# Altium PCB MainPCB.PcbDoc (part 1 of 4)
Units mm, origin at the board's own origin, x right, y up, seen from the top; angles counter-clockwise.
Board outline 219.96 x 164.97 mm, 2 copper layers (Top Layer, Bottom Layer); 298 components, 220 nets, 976 pads, 1045 vias.
Unrouted connection lines stored in the file: 1.
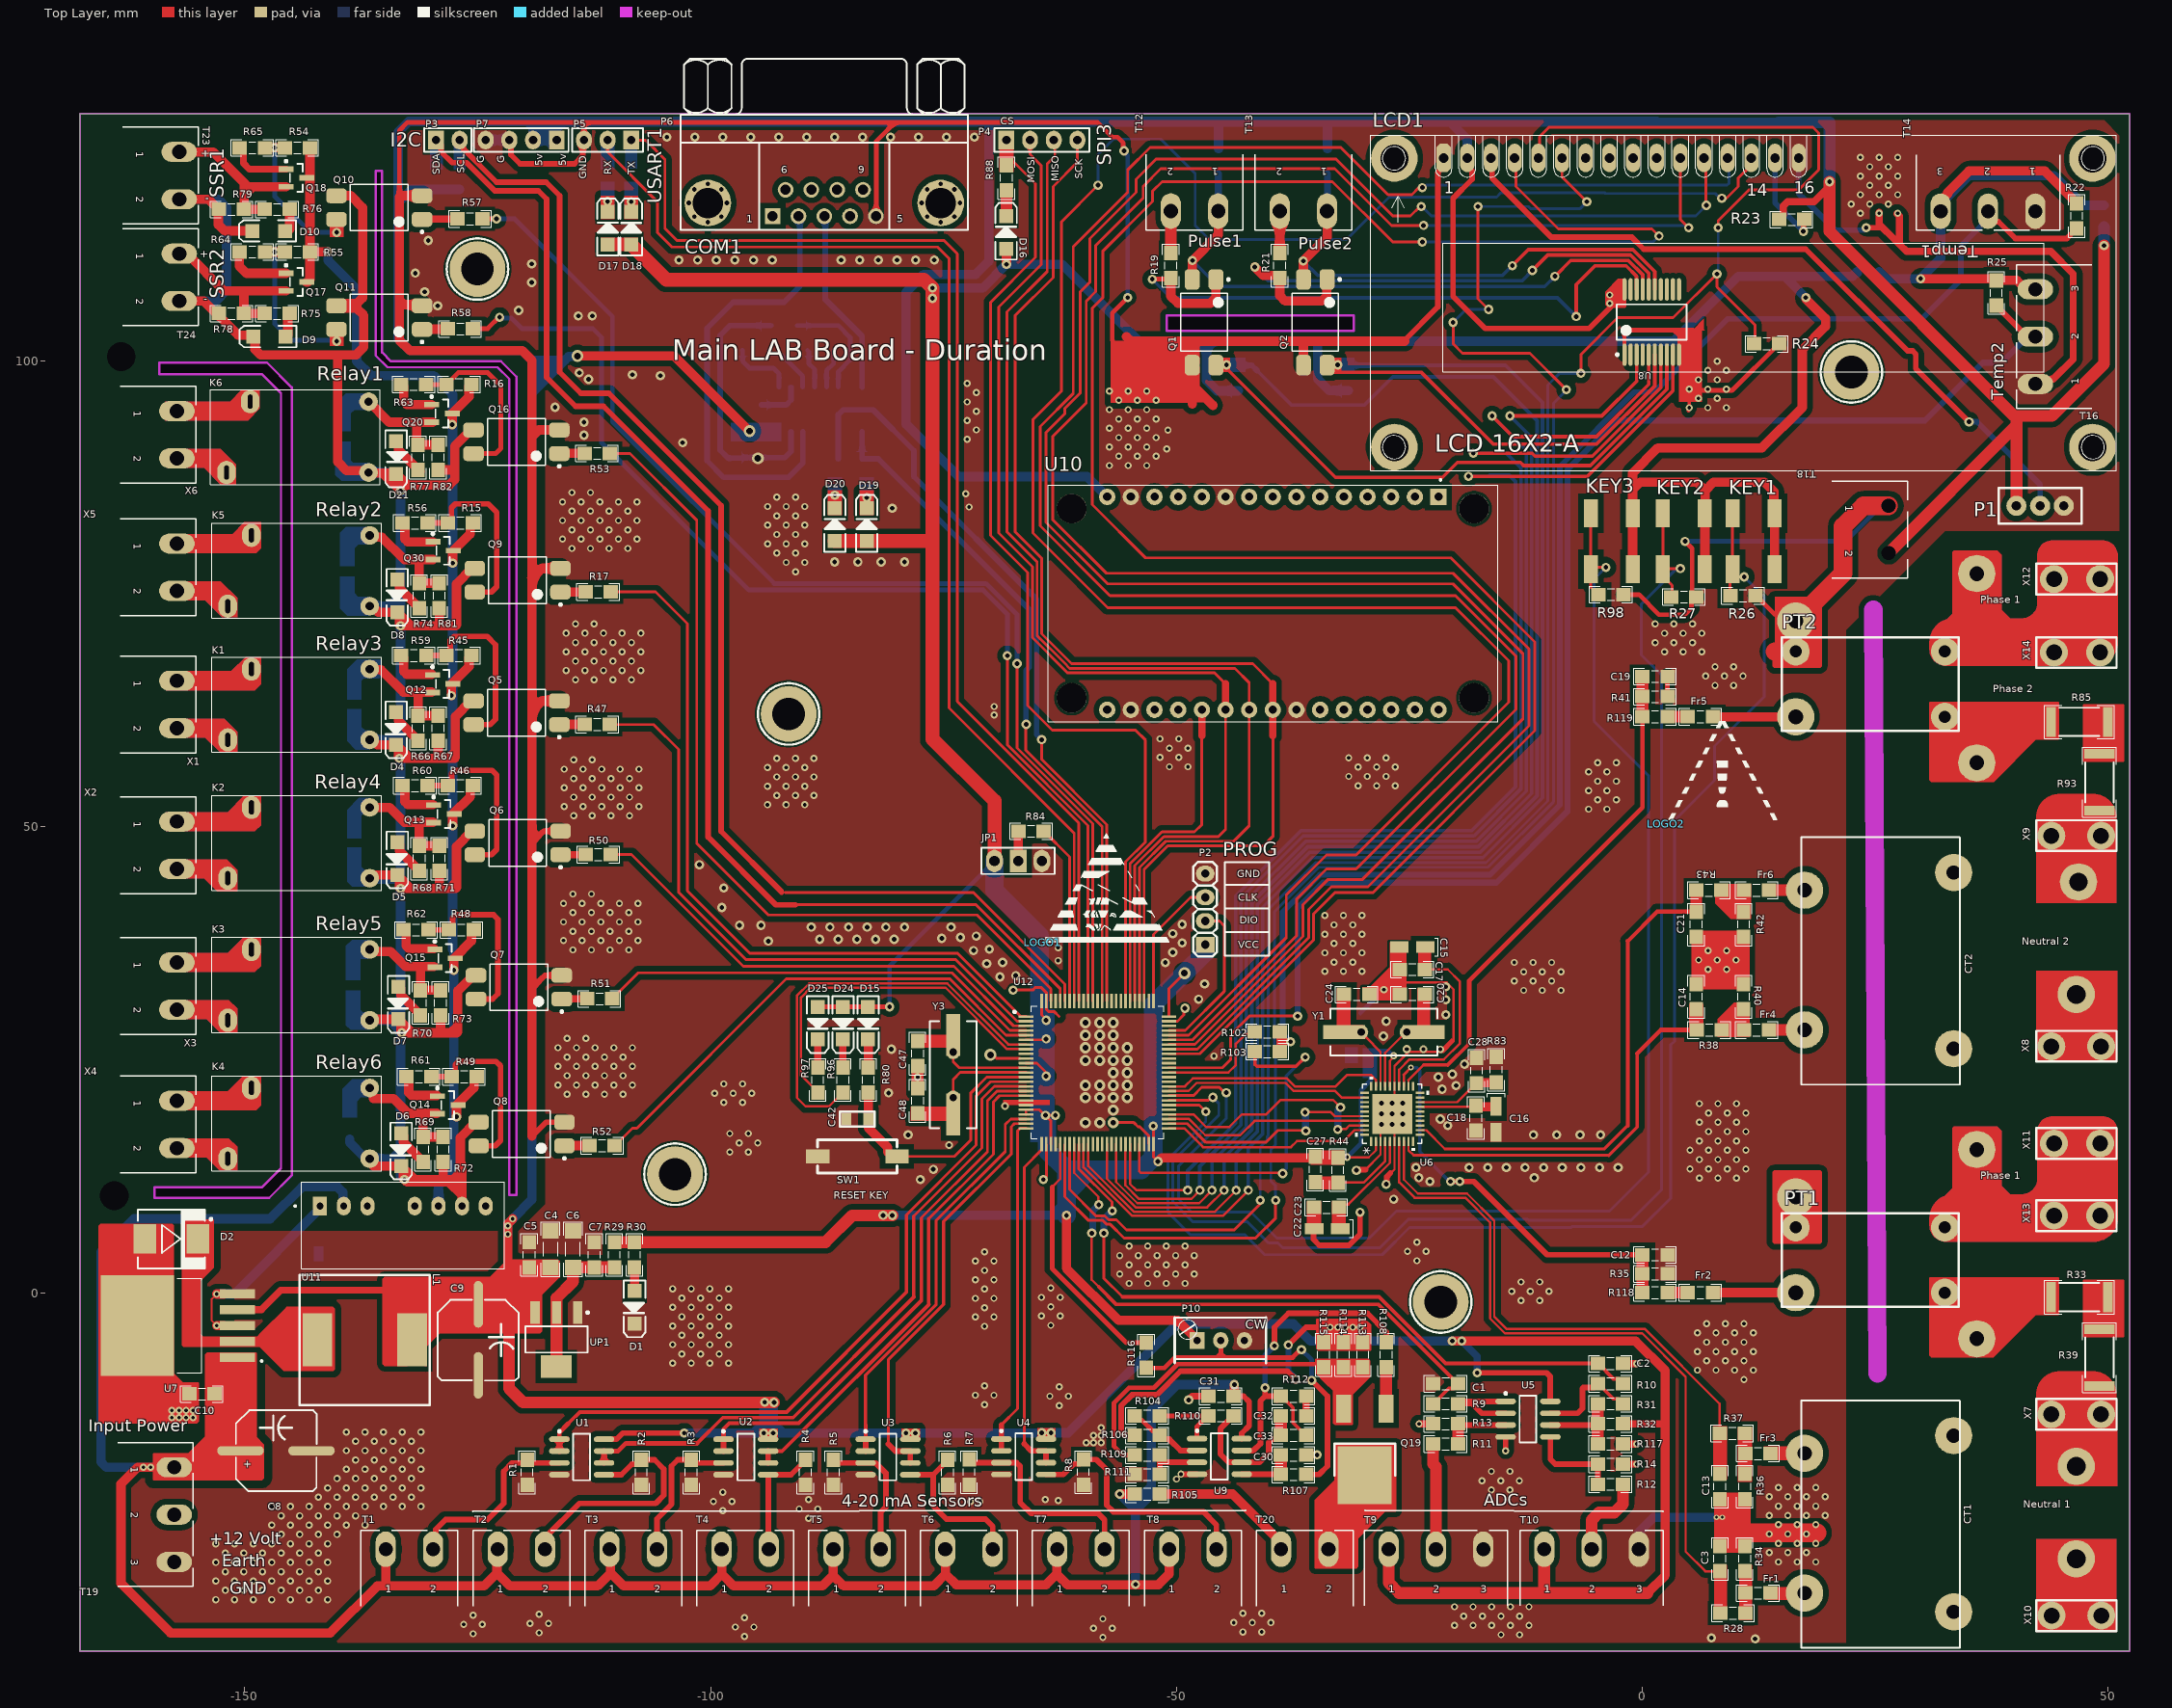
[diagram p0: Top Layer view]
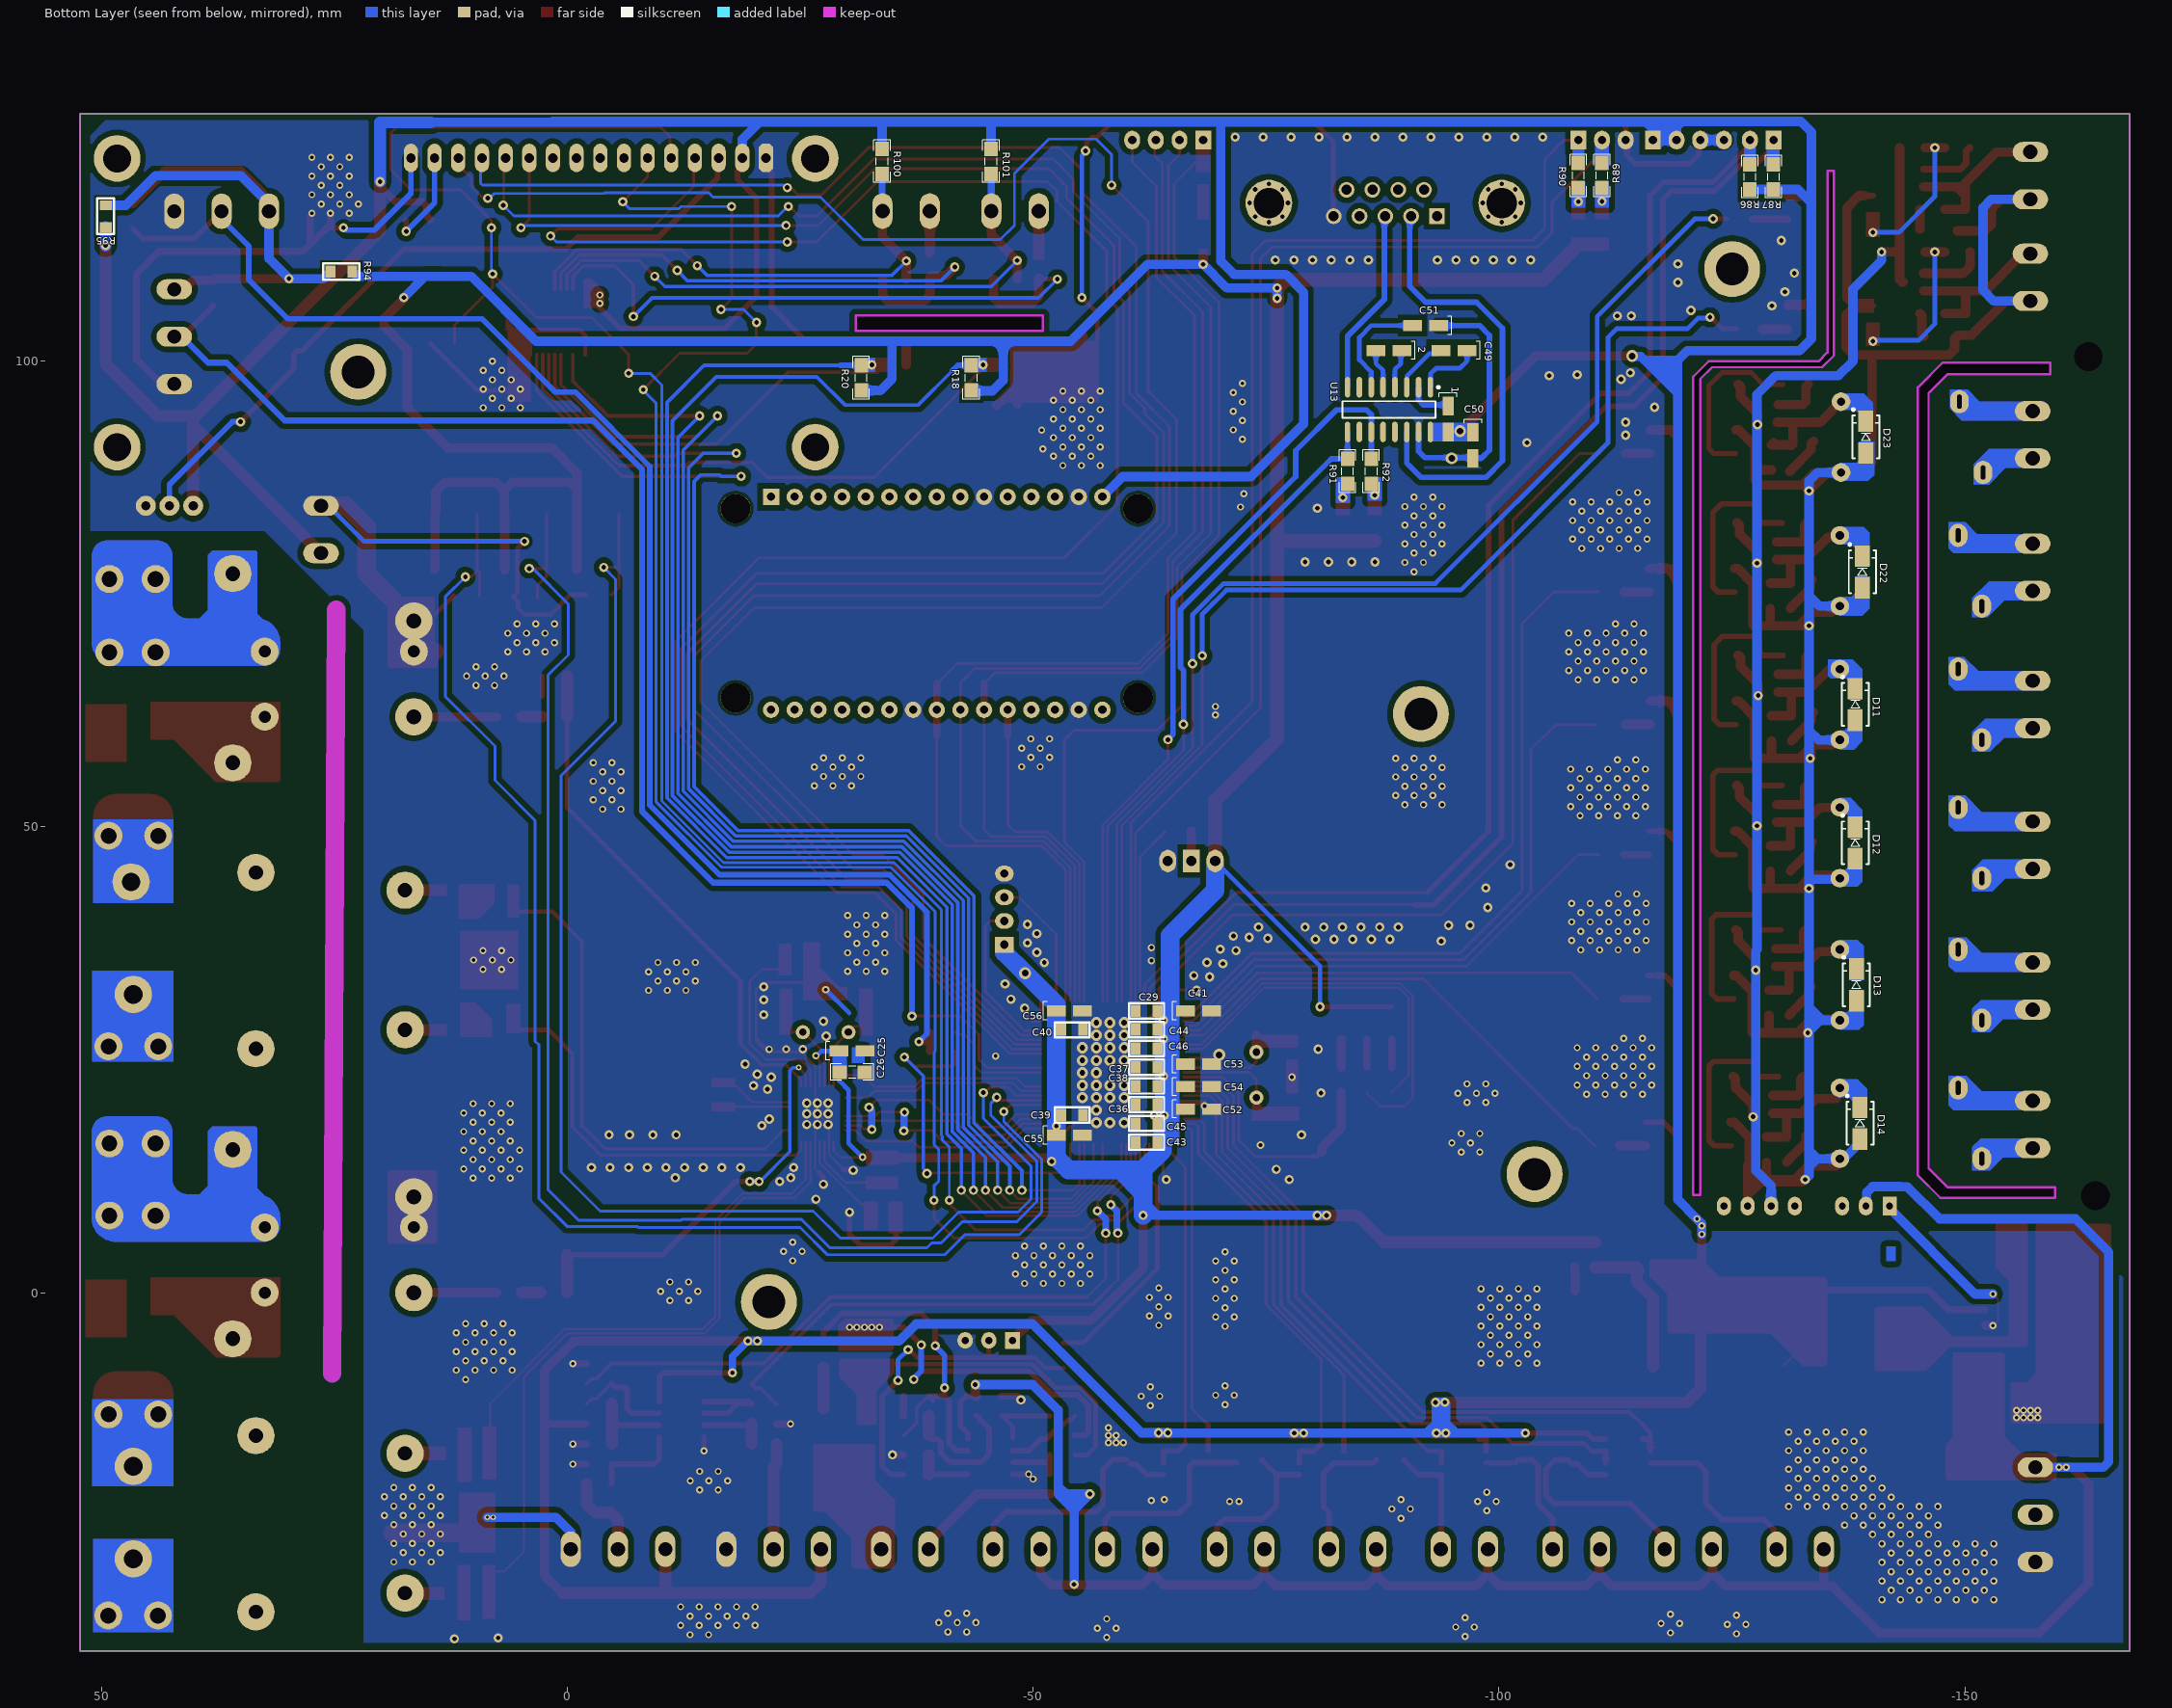
[diagram p1: Bottom Layer view, seen from below]

## Layer stack, top to bottom
Top Solder: solder mask 0.0102, Solder Resist, Dk 3.5
Top Layer: signal copper 0.0356
Dielectric 1: dielectric 0.32, FR-4, Dk 4.8
Bottom Layer: signal copper 0.0356
Bottom Solder: solder mask 0.0102, Solder Resist, Dk 3.5

## Board outline
-167.703,-38.466 52.261,-38.466 52.261,126.507 -167.703,126.507
cut-out: -134.683,99.329 -135.953,100.599 -135.953,120.411 -135.266,120.411 -135.266,100.928 -134.302,99.964 -122.491,99.964 -120.84,98.313 -120.84,67.574 -120.84,10.46 -121.602,10.46 -121.602,98.059 -122.872,99.329
cut-out: -159.702,10.175 -159.702,11.318 -148.145,11.318 -146.113,13.35 -146.113,96.535 -148.145,98.567 -159.194,98.567 -159.194,99.837 -147.637,99.837 -144.97,97.17 -144.97,12.588 -147.383,10.175
cut-out: -51.054,103.242 -51.054,104.893 -30.988,104.893 -30.988,103.242

## Design rules (kind name [scope] priority, off if disabled: settings)
Clearance NetD2_2 [InNet('NetD2_2')] p1: gap=0.6 ignorepadtopadclearanceinfootprint=FALSE except(0.8: Poly-Poly Poly-Region Poly-Text Poly-Hole)
Clearance POWER [InNet('12-volt')] p2: gap=0.6 ignorepadtopadclearanceinfootprint=FALSE except(1: Poly-Poly Poly-Region Poly-Text Poly-Hole)
Clearance Clearance_1 [OnLayer('Top Overlay') vs OnLayer('Top Overlay')] p3: gap=0.1 ignorepadtopadclearanceinfootprint=FALSE
Clearance [All] p4: gap=0.3 ignorepadtopadclearanceinfootprint=FALSE except(0.2: Arc-Track Arc-SMDPad Track-Track Track-SMDPad SMDPad-SMDPad; 0.6: Arc-Poly Track-Poly SMDPad-Poly THPad-Poly Via-Poly Fill-Poly Poly-Poly)
Height [All] p1: minheight=0 maxheight=100 prefheight=12.7
PlaneConnect [All] p1: planeconnectstyle=Direct reliefexpansion=0.508 reliefentries=4 reliefconductorwidth=0.254 reliefairgap=0.254
PolygonConnect [All] p1: connectstyle=Direct reliefconductorwidth=0.254 reliefentries=4 polygonreliefangle="90 Angle" airgapwidth=0.254
RoutingVias [All] p1: holewidth=0.5 width=1 viastyle="Through Hole" minholewidth=0.5 minwidth=0.8 maxholewidth=0.5 maxwidth=1.5
ShortCircuit ShortCircuit_1 [OnLayer('Top Overlay') vs OnLayer('Top Overlay')] p1: allowed=FALSE
ShortCircuit [All] p2: allowed=FALSE
SolderMaskExpansion [All] p1: expansion=0.102 istentingtop=FALSE
SupplyNets "Schematic Supply Nets" [InNet('VREF-')] p1: voltage=0.000
Width Width_1 [OnLayer('Top Overlay')] p1: maxlimit=0.254 minlimit=0.254 preferedwidth=0.254
Width [All] p2: maxlimit=3 minlimit=0.2 preferedwidth=0.6
27 further rules are at their usual default settings.

## Classes and differential pairs
component class Main: C29 C36 C37 C38 C39 C40 C41 C42 C43 C44 C45 C46 C47 C48 C52 C53 C54 C55 C56 D15 D24 D25 JP1 KEY1 KEY2 KEY3 LCD1 LOGO1 LOGO2 P1 P2 R23 R24 R26 R27 R80 R84 R96 R97 R98 R102 R103 SW1 U10 U12 Y3
component class Designator: D4 D5 D6 D7 D8 D9 D10 D11 D12 D13 D14 D21 D22 D23 K1 K2 K3 K4 K5 K6 Q5 Q6 Q7 Q8 Q9 Q10 Q11 Q12 Q13 Q14 Q15 Q16 Q17 Q18 Q20 Q30 R15 R16 R17 R45 R46 R47 R48 R49 R50 R51 R52 R53 R54 R55 R56 R57 R58 R59 R60 R61 R62 R63 R64 R65 R66 R67 R68 R69 R70 R71 R72 R73 R74 R75 R76 R77 R78 R79 R81 R82 T23 T24 U11 X1 X2 X3 X4 X5 X6

## Components (designator, comment, footprint, x,y, rotation, side; value= is the part's Value field where it differs from the comment)
1 "1uF" "Cap1206_(3216X18L)Size A" -94.551,95.166 r270 bottom
2 "1uF" "Cap1206_(3216X18L)Size A" -89.604,101.135 r0 bottom
C1 "100nF" CAPC3413X12N -21.13,-9.766 r0 top
C2 "100nF" CAPC3413X12N -3.444,-7.607 r180 top
C3 "2.2nF" CAPC3413X12N 8.319,-28.56 r270 top
C4 "10uF" CAPC4817X12N -117.189,4.663 r270 top
C5 "100nF" CAPC3413X12N -119.475,4.063 r270 top
C6 "100uF" CAPC4817X12N -114.776,4.663 r270 top
C7 "100nF" CAPC3413X12N -112.49,4.063 r270 top
C8 "470uF" "CAP SMD 470uF" -146.653,-16.972 r180 top
C9 "220uF" "CAP SMD 470uF" -124.936,-5.067 r90 top value=1uF
C10 "100nF" CAPC3413X12N -154.607,-10.876 r0 top
C12 "2.2nF" CAPC3413X12N 1.35,4.064 r180 top
C13 "2.2nF" CAPC3413X12N 8.319,-20.813 r90 top
C14 "2.2nF" CAPC3413X12N 5.779,31.765 r270 top
C15 "4.7uF" "CAPP 1206 (3216X18L) Size A" -23.298,37.099 r180 top value=1uF
C16 "4.7uF" "CAPP 1206 (3216X18L) Size A" -15.71,20.017 r270 top value=1uF
C17 "220nF" CAPC3413X12N -24.701,34.686 r0 top
C18 "100nF" CAPC3413X12N -17.869,18.747 r90 top
C19 "2.2nF" CAPC3413X12N 1.35,66.135 r180 top
C20 "22pF" CAPC3413X12N -24.701,32.019 r0 top
C21 "2.2nF" CAPC3413X12N 5.779,39.512 r90 top
C22 "4.7uF" "CAPP 1206 (3216X18L) Size A" -32.442,6.873 r180 top value=1uF
C23 "220nF" CAPC3413X12N -33.924,9.159 r0 top
C24 "22pF" CAPC3413X12N -30.67,32.019 r180 top
C25 "10uF" "CAPP 1206 (3216X18L) Size A" -29.158,25.947 r180 bottom value=1uF
C26 "100nF" CAPC3413X12N -30.592,23.661 r0 bottom
C27 "1uF" CAPC3413X12N -35.115,13.223 r270 top
C28 "2.2nF" CAPC3413X12N -17.803,23.834 r270 top
C29 "100nF" 0805_C -61.016,30.241 r180 bottom
C30 "1nF" CAPC3413X12N -37.453,-17.416 r180 top
C31 "100nF" CAPC3413X12N -45.253,-11.116 r0 top
C32 "10nF" CAPC3413X12N -37.453,-13.216 r180 top
C33 "1nF" CAPC3413X12N -37.453,-15.316 r180 top
C36 "100nF" 0805_C -61.016,20.172 r180 bottom
C37 "100nF" 0805_C -61.016,24.2 r180 bottom
C38 "100nF" 0805_C -61.016,22.186 r180 bottom
C39 "100nF" 0805_C -55.379,19.065 r0 bottom
C40 "100nF" 0805_C -55.379,28.209 r0 bottom
C41 "10uF" "Cap1206_(3216X18L)Size A" -66.357,30.241 r180 bottom value=1uF
C42 "100nF" 0805_C -85.435,18.634 r0 top
C43 "1uF" 0805_C -61.016,16.144 r180 bottom
C44 "1uF" 0805_C -61.016,28.227 r180 bottom
C45 "100nF" 0805_C -61.016,18.158 r180 bottom
C46 "100nF" 0805_C -61.016,26.213 r180 bottom
C47 "22pF" CAPC3413X12N -77.787,25.669 r270 top
C48 "22pF" CAPC3413X12N -77.787,20.589 r90 top
C49 "1uF" "Cap1206_(3216X18L)Size A" -96.589,101.135 r0 bottom
C50 "1uF" "Cap1206_(3216X18L)Size A" -97.218,92.35 r270 bottom
C51 "1uF" "Cap1206_(3216X18L)Size A" -93.541,103.802 r0 bottom
C52 "10uF" "Cap1206_(3216X18L)Size A" -66.357,19.7 r180 bottom value=1uF
C53 "10uF" "Cap1206_(3216X18L)Size A" -66.357,24.526 r180 bottom value=1uF
C54 "10uF" "Cap1206_(3216X18L)Size A" -66.357,22.113 r180 bottom value=1uF
C55 "10uF" "Cap1206_(3216X18L)Size A" -52.514,16.906 r180 bottom value=1uF
C56 "10uF" "Cap1206_(3216X18L)Size A" -52.514,30.241 r180 bottom value=1uF
CT1 "Current Transformer" "Current Transformer_60/0.06" 34.164,-25.004 r90 top
CT2 "Current Transformer" "Current Transformer_60/0.06" 34.164,35.448 r90 top
D1 "LED-G" "LED 1206" -108.172,-1.577 r270 top
D2 "1n5822" DO-214AB(SMC) -157.885,5.761 r0 top
D4 "SMD 1206 LED" "LED 1206" -133.754,60.558 r270 top
D5 "SMD 1206 LED" "LED 1206" -133.627,46.588 r270 top
D6 "SMD 1206 LED" "LED 1206" -133.218,15.346 r270 top
D7 "SMD 1206 LED" "LED 1206" -133.5,31.094 r270 top
D8 "SMD 1206 LED" "LED 1206" -133.634,74.782 r270 top
D9 "SMD 1206 LED" "LED 1206" -147.355,102.631 r180 top
D10 "SMD 1206 LED" "LED 1206" -147.415,113.965 r180 top
D11 "1n4007" DIOM4629X24N -138.239,63.134 r90 bottom
D12 "1n4007" DIOM4629X24N -138.239,48.275 r90 bottom
D13 "1n4007" DIOM4629X24N -138.366,33.035 r90 bottom
D14 "1n4007" DIOM4629X24N -138.747,18.176 r90 bottom
D15 "SMD 1206 LED" "LED 1206" -83.103,28.934 r270 top
D16 "SMD 1206 LED" "LED 1206" -68.295,113.79 r90 top
D17 "SMD 1206 LED" "LED 1206" -111.043,114.25 r90 top
D18 "SMD 1206 LED" "LED 1206" -108.521,114.242 r90 top
D19 "SMD 1206 LED" "LED 1206" -83.248,82.438 r90 top
D20 "SMD 1206 LED" "LED 1206" -86.677,82.438 r90 top
D21 "SMD 1206 LED" "LED 1206" -133.761,89.641 r270 top
D22 "1n4007" DIOM4629X24N -139.001,77.358 r90 bottom
D23 "1n4007" DIOM4629X24N -139.382,91.836 r90 bottom
D24 "SMD 1206 LED" "LED 1206" -85.803,28.934 r270 top
D25 "SMD 1206 LED" "LED 1206" -88.503,28.934 r270 top
Fr1 "1000" RESC3413X04N 12.383,-32.243 r180 top
Fr2 "1000" RESC3413X04N 6.209,0 r180 top
Fr3 "1000" RESC3413X04N 12.383,-17.257 r180 top
Fr4 "1000" RESC3413X04N 12.256,28.209 r180 top
Fr5 "1000" RESC3413X04N 6.209,61.817 r180 top
Fr6 "1000" RESC3413X04N 12.256,43.195 r180 top
JP1 "Jumper" "jumper selector" -64.463,46.334 r180 top
K1 "1461403-5" Miniature_Relay -142.938,63.134 r180 top
K2 "1461403-5" Miniature_Relay -142.938,48.285 r180 top
K3 "1461403-5" Miniature_Relay -142.938,33.035 r180 top
K4 "1461403-5" Miniature_Relay -142.938,18.176 r180 top
K5 "1461403-5" Miniature_Relay -142.938,77.485 r180 top
K6 "1461403-5" Miniature_Relay -143.065,91.836 r180 top
KEY1 "LTL613" LTL613 11.938,80.645 r90 top (schematic designator SW2)
KEY2 "LTL613" LTL613 4.445,80.645 r90 top (schematic designator SW3)
KEY3 "LTL613" LTL613 -3.302,80.645 r90 top (schematic designator SW4)
L1 "33uH" CDRH127 -137.128,-5.067 r270 top
LCD1 "LCD2x16" "LCD 2*16" 8.128,105.537 r0 top
LOGO1 "" "WARNING ESD" -64.325,37.607 r0 top
LOGO2 "" WARNING 2.54,50.292 r0 top
P1 "10k" Multi-Turn 42.672,84.455 r0 top
P2 "MHDR_1X04" MHDR1X04-254P -46.926,37.353 r90 top
P3 "Header 2" HDR1X2 -129.476,123.713 r0 top
P4 "Header 4" HDR1X4 -68.262,123.713 r0 top
P5 "Header 3" HDR1X3 -108.521,123.713 r180 top
P6 "DB9 Connector" "DB9 Female" -93.348,115.539 r0 top
P7 "Header 4" HDR1X4 -116.522,123.713 r180 top
P10 "NA" "Multi Turn 02" -47.797,-5.13 r90 top
PT1 "Voltage Transformer" "Isolated Voltage Transformer" 14.949,8.5 r270 top
PT2 "Voltage Transformer" "Isolated Voltage Transformer" 14.949,70.317 r270 top
Q1 "PC817XI" "SMT Gullwing Lead-Form" -47.053,104.155 r270 top
Q2 "PC817XI" "SMT Gullwing Lead-Form" -35.115,104.155 r270 top
Q5 "PC817XI" "SMT Gullwing Lead-Form" -120.84,62.245 r180 top
Q6 "PC817XI" "SMT Gullwing Lead-Form" -120.713,48.275 r180 top
Q7 "PC817XI" "SMT Gullwing Lead-Form" -120.586,32.781 r180 top
Q8 "PC817XI" "SMT Gullwing Lead-Form" -120.304,17.033 r180 top
Q9 "PC817XI" "SMT Gullwing Lead-Form" -120.72,76.469 r180 top
Q10 "PC817XI" "SMT Gullwing Lead-Form" -135.572,116.474 r180 top
Q11 "PC817XI" "SMT Gullwing Lead-Form" -135.572,104.663 r180 top
Q12 "BC337" SOT23_M -128.757,65.354 r0 top
Q13 "BC337" SOT23_M -128.63,51.384 r0 top
Q14 "BC337" SOT23_M -128.221,20.142 r0 top
Q15 "BC337" SOT23_M -128.503,35.89 r0 top
Q16 "PC817XI" "SMT Gullwing Lead-Form" -120.847,91.328 r180 top
Q17 "BC337" SOT23_M -144.462,108.473 r0 top
Q18 "BC337" SOT23_M -144.462,119.649 r0 top
Q19 "MJD44H11T4G" DPACK-SMD -29.803,-19.616 r180 top
Q20 "BC337" SOT23_M -128.841,94.376 r0 top
Q30 "BC337" SOT23_M -128.714,79.644 r0 top
R1 "150" RESC3413X04N -119.697,-19.289 r90 top
R2 "150" RESC3413X04N -107.443,-19.289 r90 top
R3 "150" RESC3413X04N -102.075,-19.289 r90 top
R4 "150" RESC3413X04N -89.834,-19.289 r90 top
R5 "150" RESC3413X04N -86.831,-19.289 r90 top
R6 "150" RESC3413X04N -74.577,-19.289 r90 top
R7 "150" RESC3413X04N -72.257,-19.266 r90 top
R8 "150" RESC3413X04N -60.003,-19.266 r90 top
R9 "10K" RESC3413X04N -21.13,-11.925 r0 top
R10 "10" RESC3413X04N -3.444,-9.766 r180 top
R11 "0" RESC3413X04N -21.13,-16.243 r0 top
R12 "0" RESC3413X04N -3.444,-20.561 r180 top
R13 "1k" RESC3413X04N -21.13,-14.084 r0 top
R14 "10k" RESC3413X04N -3.444,-18.402 r180 top
R15 "10K" RESC3413X04N -126.885,82.627 r0 top
R16 "10K" RESC3413X04N -127.012,97.486 r0 top
R17 "100" RESC3413X04N -112.064,75.23 r180 top
R18 "10K" RESC3413X04N -43.37,98.186 r270 bottom
R19 "1K" RESC3413X04N -50.609,110.251 r270 top
R20 "10K" RESC3413X04N -31.559,98.186 r270 bottom
R21 "1K" RESC3413X04N -38.925,110.251 r270 top
R22 "470R" RESC3413X04N 46.609,115.57 r90 top
R23 "330" RESC3413X04N 16.002,115.189 r180 top
R24 "10k" RESC3413X04N 13.335,101.854 r0 top
R25 "470R" RESC3413X04N 37.973,107.315 r90 top
R26 "10k" RESC3413X04N 10.795,74.803 r180 top
R27 "10k" RESC3413X04N 4.445,74.676 r180 top
R28 "100" RESC3413X04N 9.716,-34.402 r180 top
R29 "0 OHM" RESC3413X04N -110.331,4.063 r90 top
R30 "1K" RESC3413X04N -108.172,4.063 r90 top
R31 "150" RESC3413X04N -3.444,-11.925 r180 top
R32 "10k" RESC3413X04N -3.444,-14.084 r0 top
R33 "Resistor" RES2512 46.893,-0.495 r180 top value=220k
R34 "12.4" RESC3413X04N 10.986,-28.56 r90 top
R35 "1K" RESC3413X04N 1.35,2.032 r180 top
R36 "12.4" RESC3413X04N 10.986,-20.813 r90 top
R37 "100" RESC3413X04N 9.636,-15.098 r180 top
R38 "100" RESC3413X04N 7.176,28.209 r180 top
R39 "Resistor" RES2512 49.054,-6.97 r270 top value=220k
R40 "12.4" RESC3413X04N 10.859,31.765 r90 top
R41 "1K" RESC3413X04N 1.35,63.976 r180 top
R42 "12.4" RESC3413X04N 10.859,39.512 r90 top
R43 "100" RESC3413X04N 7.129,43.195 r180 top
R44 "10K" RESC3413X04N -32.681,13.161 r90 top
R45 "10K" RESC3413X04N -127.005,68.403 r0 top
R46 "10K" RESC3413X04N -126.878,54.433 r0 top
R47 "100" RESC3413X04N -112.184,61.006 r180 top
R48 "10K" RESC3413X04N -126.751,38.939 r0 top
R49 "10K" RESC3413X04N -126.469,23.191 r0 top
R50 "100" RESC3413X04N -112.057,47.036 r180 top
R51 "100" RESC3413X04N -111.93,31.542 r180 top
R52 "100" RESC3413X04N -111.648,15.794 r180 top
R53 "100" RESC3413X04N -112.191,90.089 r180 top
R54 "10K" RESC3413X04N -144.364,122.886 r0 top
R55 "10K" RESC3413X04N -144.364,111.71 r0 top
R56 "100" RESC3413X04N -131.744,82.627 r180 top
R57 "100" RESC3413X04N -125.822,115.266 r180 top
R58 "100" RESC3413X04N -126.885,103.455 r180 top
R59 "100" RESC3413X04N -131.864,68.403 r180 top
R60 "100" RESC3413X04N -131.737,54.433 r180 top
R61 "100" RESC3413X04N -131.328,23.191 r180 top
R62 "100" RESC3413X04N -131.61,38.939 r180 top
R63 "100" RESC3413X04N -131.871,97.486 r180 top
R64 "100" RESC3413X04N -149.19,111.71 r180 top
R65 "100" RESC3413X04N -149.19,122.886 r180 top
R66 "1K" RESC3413X04N -131.403,60.576 r90 top
R67 "10K" RESC3413X04N -129.244,60.576 r90 top
R68 "1K" RESC3413X04N -131.276,46.606 r90 top
R69 "1K" RESC3413X04N -130.867,15.364 r90 top
R70 "1K" RESC3413X04N -131.149,31.112 r90 top
R71 "10K" RESC3413X04N -129.117,46.606 r90 top
R72 "10K" RESC3413X04N -128.708,15.364 r90 top
R73 "10K" RESC3413X04N -128.99,31.112 r90 top
R74 "1K" RESC3413X04N -131.283,74.8 r90 top
R75 "1K" RESC3413X04N -146.523,105.106 r180 top
R76 "1K" RESC3413X04N -146.523,116.282 r180 top
R77 "1K" RESC3413X04N -131.41,89.659 r90 top
R78 "10K" RESC3413X04N -151.429,105.106 r0 top
R79 "10K" RESC3413X04N -151.429,116.282 r0 top
R80 "1K" RESC3413X04N -83.078,22.834 r90 top
R81 "10K" RESC3413X04N -129.124,74.8 r90 top
R82 "10K" RESC3413X04N -129.251,89.659 r90 top
R83 "1K" RESC3413X04N -15.703,23.934 r270 top
R84 "10K" RESC3413X04N -65.603,49.534 r0 top
R85 "Resistor" RES2512 46.893,61.26 r180 top value=220k
R86 "4.7K" RESC3413X04N -126.936,119.776 r270 bottom
R87 "4.7K" RESC3413X04N -129.476,119.776 r270 bottom
R88 "1K" RESC3413X04N -68.262,119.649 r270 top
R89 "1K" RESC3413X04N -111.061,119.903 r270 bottom
R90 "1K" RESC3413X04N -108.521,119.903 r270 bottom
R91 "1K" RESC3413X04N -83.756,88.153 r270 bottom
R92 "1K" RESC3413X04N -86.296,88.153 r270 bottom
R93 "Resistor" RES2512 49.054,54.785 r270 top value=220k
R94 "0R" 0805_R 25.4,109.601 r180 bottom
R95 "0R" 0805_R 49.53,116.713 r270 bottom
R96 "1K" RESC3413X04N -85.803,22.834 r90 top
R97 "1K" RESC3413X04N -88.503,22.834 r90 top
R98 "10k" RESC3413X04N -3.382,74.93 r180 top
R100 "10K" RESC3413X04N -33.803,121.434 r90 bottom
R101 "10K" RESC3413X04N -45.503,121.434 r90 bottom
R102 "1K" RESC3413X04N -40.253,27.984 r180 top
R103 "1K" RESC3413X04N -40.253,25.884 r180 top
R104 "27K" RESC3413X04N -53.153,-13.216 r0 top
R105 "0" RESC3413X04N -53.153,-21.616 r0 top
R106 "1K" RESC3413X04N -53.153,-15.316 r0 top
R107 "10" RESC3413X04N -37.453,-19.516 r180 top
R108 "2.2" RESC3413X04N -27.503,-6.666 r270 top
R109 "1K" RESC3413X04N -53.153,-17.416 r0 top
R110 "1K" RESC3413X04N -45.253,-13.216 r0 top
R111 "27K" RESC3413X04N -53.153,-19.516 r0 top
R112 "10K" RESC3413X04N -37.453,-11.116 r180 top
R113 "15" RESC3413X04N -30.003,-6.666 r270 top
R114 "15" RESC3413X04N -32.103,-6.666 r270 top
R115 "15" RESC3413X04N -34.203,-6.666 r270 top
R116 "NA" RESC3413X04N -53.258,-6.734 r90 top
R117 "1k" RESC3413X04N -3.444,-16.243 r0 top
R118 "1K" RESC3413X04N 1.35,0 r0 top
R119 "1K" RESC3413X04N 1.35,61.817 r0 top
SW1 "LTL613" pb-kfc-3x6x5 -84.264,14.62 r0 top
T1 "PHOENIX" "MSTB 2,5/2-G-5,08"#1 -132.332,-27.545 r0 top
T2 "PHOENIX" "MSTB 2,5/2-G-5,08"#1 -120.321,-27.545 r0 top
T3 "PHOENIX" "MSTB 2,5/2-G-5,08"#1 -108.311,-27.545 r0 top
T4 "PHOENIX" "MSTB 2,5/2-G-5,08"#1 -96.3,-27.545 r0 top
T5 "PHOENIX" "MSTB 2,5/2-G-5,08"#1 -84.29,-27.545 r0 top
T6 "PHOENIX" "MSTB 2,5/2-G-5,08"#1 -72.279,-27.545 r0 top
T7 "PHOENIX" "MSTB 2,5/2-G-5,08"#1 -60.269,-27.545 r0 top
T8 "PHOENIX" "MSTB 2,5/2-G-5,08"#1 -48.258,-27.545 r0 top
T9 "PHOENIX" "MSTB 2,5/3-G-5,08" -22.161,-27.544 r0 top
T10 "PHOENIX" "MSTB 2,5/3-G-5,08" -5.46,-27.544 r0 top
T12 "PHOENIX" "MSTB 2,5/2-G-5,08"#1 -48.069,116.093 r180 top
T13 "PHOENIX" "MSTB 2,5/2-G-5,08"#1 -36.385,116.093 r180 top
T14 "PHOENIX" "MSTB 2,5/3-G-5,08" 37.084,116.078 r180 top
T16 "PHOENIX" "MSTB 2,5/3-G-5,08" 42.164,102.616 r90 top
T18 "PHOENIX" "MSTB 2,5/2-G-5,08"#2 26.416,81.915 r270 top
T19 "PHOENIX" "MSTB 2,5/3-G-5,08" -157.575,-23.83 r270 top
T20 "PHOENIX" "MSTB 2,5/2-G-5,08"#1 -36.247,-27.545 r0 top
T23 "PHOENIX" "MSTB 2,5/2-G-5,08"#1 -157.035,119.903 r270 top
T24 "PHOENIX" "MSTB 2,5/2-G-5,08"#1 -157.035,108.981 r270 top
U1 "LM358D" SO-8_N -113.842,-17.638 r0 top
U2 "LM358D" SO-8_N -96.233,-17.638 r0 top
U3 "LM358D" SO-8_N -80.976,-17.638 r0 top
U4 "LM358D" SO-8_N -66.402,-17.615 r0 top
U5 "LM358D" SO-8_N -12.287,-13.576 r0 top
U6 "ADE7880ACPZ" CP_40_10_ADI -26.86,19.192 r90 top
U7 "LM2596" TO170P1524X483-6N -157.194,-3.543 r180 top
U8 "74HCT244" SSOP20_M 0.997,104.184 r90 top
U9 "LM358D" SO-8_N -45.403,-17.581 r0 top
U10 "ZC563900" MODULE_ZC563900 -39.669,73.991 r270 top
U11 "MCWI05" MCWI05_PCB -134.81,7.254 r0 top
U12 "STM32F107VCT6" QFP50P1600X1600X160-100N -58.483,23.637 r0 top locked
U13 "MAX232" SOIC-16 -88.201,94.785 r270 bottom
UP1 "3V3" SOT223_N -116.554,-5.034 r270 top
X1 "CON_Phoenix_MKDSN_02" "MSTB 2,5/2-G-5,08"#1 -157.289,63.134 r270 top
X2 "CON_Phoenix_MKDSN_02" "MSTB 2,5/2-G-5,08"#1 -157.289,48.021 r270 top
X3 "CON_Phoenix_MKDSN_02" "MSTB 2,5/2-G-5,08"#1 -157.289,32.908 r270 top
X4 "CON_Phoenix_MKDSN_02" "MSTB 2,5/2-G-5,08"#1 -157.289,18.049 r270 top
X5 "CON_Phoenix_MKDSN_02" "MSTB 2,5/2-G-5,08"#1 -157.289,77.866 r270 top
X6 "CON_Phoenix_MKDSN_02" "MSTB 2,5/2-G-5,08"#1 -157.289,92.09 r270 top
X7 "Cooler" Cooler#1 42.244,-14.701 r0 top
X8 "Cooler" Cooler#1 42.244,24.796 r0 top
X9 "Cooler" Cooler#1 42.244,47.402 r0 top
X10 "Cooler" Cooler#1 50.88,-33.021 r180 top
X11 "Cooler" Cooler#2 50.88,17.652 r180 top
X12 "Cooler" Cooler#2 50.88,78.231 r180 top
X13 "Cooler" Cooler#2 50.88,9.905 r180 top
X14 "Cooler" Cooler#2 50.88,70.357 r180 top
Y1 "16.384MHz" "Crystal SMD" -27.749,27.955 r0 top value="12 MHz"
Y3 "8 MHz" "Crystal SMD" -73.977,23.383 r90 top value="12 MHz"

## Footprints (in the part's own frame and the unit in brackets; to place one, negate y for a bottom-side part, rotate by r counter-clockwise, add the part's x,y. Pads: shape width x height; smd on the part's side, far side on the other; paste and mask are expansions set on the pad)
0805_C [mm]
  rect 1.05x1.3 smd: 1(0.007,0) 2(2.357,0)
  silkscreen extent -0.69,-0.81 3.05,0.81, body extent 0.19,-0.62 2.19,0.63, height 0.78
0805_R [mm]
  rect 1.05x1.3 smd: 1(0,0) 2(2.35,0)
  silkscreen extent -0.76,-0.89 3.1,0.89, body extent 0.07,-0.67 2.37,0.68, height 0.76
"Cap1206_(3216X18L)Size A" [mm] "Chip Capacitor, 2-Leads, Body 3.2x1.6mm, IPC High Density, chip Tantalum"
  rect 1.999x1.199 smd: 1(0,0) 2(2.8,0)
  silkscreen extent -1.38,-0.97 -0.99,0.97, body extent -0.43,-0.9 3.21,0.9, height 1.8
"CAP SMD 470uF" [mm] "SMD CAP 470uF"
  oval 5x1 smd: 1(3.81,0) 2(-3.81,0)
  silkscreen extent -4.37,-4.34 4.29,4.34, body extent -4.53,-4.15 4.47,4.15, height 12
CAPC3413X12N [mm] "Chip Capacitor, 2-Leads, Body 3/40x1/30mm, IPC Medium Density-Design:Abbas Basereh"
  rect 1.55x1.45 smd: 1(-1.35,0) 2(1.35,0)
  silkscreen extent -2.29,-0.89 2.29,0.89, body extent -1,-0.62 1,0.63, height 0.78
CAPC4817X12N [mm] "Chip Capacitor, 2-Leads, Body 4/80x1/70mm, IPC Medium Density-Design:Abbas Basereh"
  rect 1.65x1.75 smd: 1(-1.95,0) 2(1.95,0)
  silkscreen extent -2.92,-1.02 2.92,1.02, body extent -1.6,-0.8 1.6,0.8, height 1
"CAPP 1206 (3216X18L) Size A" [mm] "Chip Capacitor, 2-Leads, Body 3.2x1.6mm, IPC High Density, chip Tantalum"
  rect 1.999x1.199 smd: 1(0,0) 2(2.8,0)
  silkscreen extent -1.38,-0.97 -0.99,0.97, body extent -0.43,-0.9 3.21,0.9, height 1.8
CDRH127 [mm]
  rect 5.715x3.175 smd: 1(0,5.08) 2(0,-5.08)
  silkscreen extent -6.99,-6.99 6.99,6.99, body extent -6,-6.17 6,6.17, height 6.23
Cooler#1 [mm]
  round 3 hole 1.7: 1(1.635,1.635) 1(6.969,1.635)
  silkscreen extent 0,0 8.64,3.3, body extent 0.07,1.4 8.57,1.9, height 10.5
Cooler#2 [mm]
  round 3 hole 1.7: 1(1.762,1.635) 1(6.715,1.635)
  silkscreen extent 0,0 8.64,3.3, body extent 0.07,1.4 8.57,1.9, height 10.5
CP_40_10_ADI [mm]
  rect 0.948x0.25 smd paste+0 mask+0: 1(-2.974,2.25) 2(-2.974,1.75) 3(-2.974,1.25) 4(-2.974,0.75) 5(-2.974,0.25) 6(-2.974,-0.25) 7(-2.974,-0.75) 8(-2.974,-1.25) 9(-2.974,-1.75) 10(-2.974,-2.25) 21(2.974,-2.25) 22(2.974,-1.75) 23(2.974,-1.25) 24(2.974,-0.75) 25(2.974,-0.25) 26(2.974,0.25) 27(2.974,0.75) 28(2.974,1.25) 29(2.974,1.75) 30(2.974,2.25)
  rect 0.25x0.948 smd paste+0 mask+0: 11(-2.25,-2.974) 12(-1.75,-2.974) 13(-1.25,-2.974) 14(-0.75,-2.974) 15(-0.25,-2.974) 16(0.25,-2.974) 17(0.75,-2.974) 18(1.25,-2.974) 19(1.75,-2.974) 20(2.25,-2.974) 31(2.25,2.974) 32(1.75,2.974) 33(1.25,2.974) 34(0.75,2.974) 35(0.25,2.974) 36(-0.25,2.974) 37(-0.75,2.974) 38(-1.25,2.974) 39(-1.75,2.974) 40(-2.25,2.974)
  rect 4.3x4.3 smd paste-2.137 mask+0: 41(0,0)
  silkscreen extent -3.96,-3.96 3.96,3.96, body extent -3.05,-3.05 3.05,3.05, height 0.8
"Crystal SMD" [mm] "DESIGNER ABBAS BASEREH"
  rect 4.5x1.5 smd: 1(-4.25,0) 2(4.25,0)
  silkscreen extent -5.75,-2.5 5.75,2.5, body extent -6.21,-2.25 6.09,2.25, height 5.18
"Current Transformer_60/0.06" [mil]
  round 157.48 hole 60: 0(-365,30) 0(380,30) 1(305,660) 2(-285,660)
  silkscreen extent -516,4 529,674, body extent -512,5 532,678, height 1122
"DB9 Female" [mm] "Connector; D Subminiature AMPLIMITE 2000; 9 Position; Right Angle"
  rect 1.69x1.69 hole 1.09: 1(0,0)
  round 1.69 hole 1.09: 2(2.77,0) 3(5.54,0) 4(8.31,0) 5(11.08,0) 6(1.385,2.84) 7(4.155,2.84) 8(6.925,2.84) 9(9.695,2.84)
  round 0.8 hole 0.5 mask+0.102: 10(-9.015,1.42) 10(-8.412,-0.037) 10(-8.412,2.877) 10(-6.955,-0.64) 10(-6.955,3.48) 10(-5.498,-0.037) 10(-5.498,2.877) 10(-4.895,1.42) 11(15.975,1.42) 11(16.578,-0.037) 11(16.578,2.877) 11(18.035,-0.64) 11(18.035,3.48) 11(19.492,-0.037) 11(19.492,2.877) 11(20.095,1.42)
  round 5 hole 3.26 mask+0.102: 10(-6.955,1.42) 11(18.035,1.42)
  silkscreen extent -9.86,-1.48 20.94,16.92, body extent -9.87,-2.03 20.95,17.04, height 12.71
DIOM4629X24N [mm] "Molded Diode, 2-Leads, Body 4/60x2/90mm, IPC Medium Density-Design:Abbas Basereh"
  rect 2.3x1.6 smd: 1(-1.7,0) 2(1.7,0)
  silkscreen extent -2.3,-1.45 3.07,1.48, body extent -2.5,-1.22 2.5,1.48, height 2.2
DO-214AB(SMC) [mm] "Molded Diode, 2-Leads, Body 6/85x5/90mm, IPC Medium Density DESIGNER ABBAS BASEREH"
  rect 2.45x3.15 smd: 1(-2.85,0) 2(2.85,0)
  silkscreen extent -3.6,-3.2 4.38,3.15, body extent -3.77,-3.11 3.77,3.11, height 2.62
DPACK-SMD [mm]
  rect 1.6x3 smd: 1(-2.285,-7.18) 3(2.285,-7.18)
  rect 5.8x6.2 smd: 2(0,0)
  silkscreen extent -3.27,-3.43 3.27,0
HDR1X2 [mm] "Connector; Header; 2 Position"
  rect 1.7x2 hole 0.9: 1(0,0)
  oval 1.7x2 hole 0.9: 2(2.54,0)
  silkscreen extent -1.27,-1.27 3.81,1.27, body extent -1.27,-1.28 3.81,1.26, height 8.79
HDR1X3 [mm] "Connector; Header; 3 Position"
  rect 1.7x2 hole 0.9: 1(0,0)
  oval 1.7x2 hole 0.9: 2(2.54,0) 3(5.08,0)
  silkscreen extent -1.27,-1.27 6.35,1.27, body extent -1.26,-1.27 6.36,1.27, height 8.38
HDR1X4 [mm] "Connector; Header; 4 Position"
  rect 1.7x2 hole 0.9: 1(0,0)
  oval 1.7x2 hole 0.9: 2(2.54,0) 3(5.08,0) 4(7.62,0)
  silkscreen extent -1.27,-1.27 8.89,1.27, body extent -1.27,-1.28 8.89,1.26, height 8.38
"Isolated Voltage Transformer" [mm]
  round 3 hole 1.3: 1(1.5,1.5) 2(8.5,1.5) 3(1.5,17.5) 4(8.5,17.5)
  silkscreen extent 0,0 10,19, body extent -0.15,-0.12 10.05,19.18, height 18.1
"jumper selector" [mm]
  oval 1.8x2.4 hole 1.1: 1(0,0) 3(5.08,0)
  rect 1.8x2.4 hole 1.1: 2(2.54,0)
  silkscreen extent -1.4,-1.4 6.48,1.4, body extent -1.24,-1.27 6.38,1.27, height 10.16
"LCD 2*16" [mil] "LCD"
  round 196.85 hole 118.11: 1(-1368.35,-581.69) 1(-1368.35,638.31) 1(1581.65,-581.69) 1(1581.65,638.31)
  oct 60x120 hole 40: 1(-1160,640)
  oval 60x120 hole 40: 2(-1060,640) 3(-960,640) 4(-860,640) 5(-760,640) 6(-660,640) 7(-560,640) 8(-460,640) 9(-360,640) 10(-260,640) 11(-160,640) 12(-60,640) 13(40,640) 14(140,640) 15(240,640) 16(340,640)
  silkscreen extent -1468,-681 1681,737, body extent -1470,-681 1679,736, height 453
"LED 1206" [mm]
  rect 1.5x1.5 smd: 1(-1.75,0) 2(1.75,0)
  silkscreen extent -2.9,-1.15 3.2,1.15, body extent -1.65,-0.72 1.65,0.73, height 1.36
LTL613 [mm]
  rect 3x1.5 smd: 1(-3,2.25) 1(3,2.25) 2(-3,-2.25) 2(3,-2.25)
  body extent -4.04,-3 4.04,3, height 5
MCWI05_PCB [mm]
  rect 1.5x2 hole 0.75: 1(-7.112,2.032)
  oval 1.5x2 hole 0.75: 2(-4.572,2.032) 3(-2.032,2.032) 5(3.048,2.032) 6(5.588,2.032) 7(8.128,2.032) 8(10.668,2.032)
  silkscreen extent -9.89,-4.69 12.69,4.61, body extent -9.12,-4.95 12.68,4.62, height 11.83
MHDR1X04-254P [mm] "Male Header 1X04 with 2.54 mm Pitch"
  rect 1.7x2 hole 0.9: 1(0,0)
  oval 1.7x2 hole 0.9: 2(2.54,0) 3(5.08,0) 4(7.62,0)
  silkscreen extent -1.27,-1.27 8.89,1.27, body extent -1.27,-1.27 8.89,1.27, height 8.43
Miniature_Relay [mm]
  round 2 hole 0.9: C1(-6.35,3.8) C2(-6.35,-3.8)
  oval 2x2.5 hole 1.5 slot 0.5 at 0 deg: M(6.35,-3.8) NO(8.89,3.8)
  silkscreen extent -7.6,-5.1 10.6,5.1, body extent -7.62,-5.12 10.58,5.08, height 15.86
MODULE_ZC563900 [mil]
  rect 69x69 hole 35: 1(-450,700)
  round 69 hole 35: 2(-450,600) 3(-450,500) 4(-450,400) 5(-450,300) 6(-450,200) 7(-450,100) 8(-450,0) 9(-450,-100) 10(-450,-200) 11(-450,-300) 12(-450,-400) 13(-450,-500) 14(-450,-600) 15(-450,-700) 16(450,-700) 17(450,-600) 18(450,-500) 19(450,-400) 20(450,-300) 21(450,-200) 22(450,-100) 23(450,0) 24(450,100) 25(450,200) 26(450,300) 27(450,400) 28(450,500) 29(450,600) 30(450,700)
  round 125.98 hole 125.98 unplated: ""(-400,850) ""(-400,-850) ""(400,850) ""(400,-850)
  silkscreen extent -526,-950 500,950, body extent -507,-974 507,954, height 379
"MSTB 2,5/2-G-5,08"#1 [mil] "Header, Nominal current: 12 A Rated voltage (III/2): 320 V Number of positions: 2 Pitch: 5.08 mm Color: green Contact surface: Tin Assembly: Soldering DESIGNER:ABBAS BASEREH"
  oval 85x150 hole 60: 1(-100,0) 2(100,0)
  silkscreen extent -205,-240 205,80, body extent -199,-394 201,79, height 340
"MSTB 2,5/2-G-5,08"#2 [mil] "Header, Nominal current: 12 A Rated voltage (III/2): 320 V Number of positions: 2 Pitch: 5.08 mm Color: green Contact surface: Tin Assembly: Soldering DESIGNER:ABBAS BASEREH"
  round 0 / inner oval 85x150 / far side oval 85x150 hole 60: 1(-100,0) 2(100,0)
  silkscreen extent -205,-240 205,80, body extent -199,-394 201,79, height 340
"MSTB 2,5/3-G-5,08" [mil] "Header, Nominal current: 12 A Rated voltage (III/2): 320 V Number of positions: 3 Pitch: 5.08 mm Color: green Contact surface: Tin Assembly: Soldering  DESIGNER:ABBAS BASEREH"
  oval 85x150 hole 60: 1(-200,0) 2(0,0) 3(200,0)
  silkscreen extent -303,-238 303,80, body extent -300,-394 300,79, height 340
"Multi Turn 02" [mil]
  rect 70x65 hole 30: 1(0,0)
  oval 70x65 hole 30: 2(0,-100) 3(0,-200)
  silkscreen extent -94,-291 96,94, body extent -73,-285 93,89, height 452
Multi-Turn [mil]
  round 85 hole 40: 1(-100,0) 2(0,0) 3(100,0)
  silkscreen extent -175,-75 175,75, body extent -181,-94 181,94, height 530
pb-kfc-3x6x5 [mm] "taktile switch"
  rect 2.5x1.5 smd: 0(-4.25,0) 1(4.25,0)
  silkscreen extent -4.25,-1.8 4.25,1.8, body extent -4.25,-1.8 4.25,1.8, height 5
QFP50P1600X1600X160-100N [mm]
  rrect25% 1.56x0.28 smd: 1(-7.68,6) 2(-7.68,5.5) 3(-7.68,5) 4(-7.68,4.5) 5(-7.68,4) 6(-7.68,3.5) 7(-7.68,3) 8(-7.68,2.5) 9(-7.68,2) 10(-7.68,1.5) 11(-7.68,1) 12(-7.68,0.5) 13(-7.68,0) 14(-7.68,-0.5) 15(-7.68,-1) 16(-7.68,-1.5) 17(-7.68,-2) 18(-7.68,-2.5) 19(-7.68,-3) 20(-7.68,-3.5) 21(-7.68,-4) 22(-7.68,-4.5) 23(-7.68,-5) 24(-7.68,-5.5) 25(-7.68,-6) 51(7.68,-6) 52(7.68,-5.5) 53(7.68,-5) 54(7.68,-4.5) 55(7.68,-4) 56(7.68,-3.5) 57(7.68,-3) 58(7.68,-2.5) 59(7.68,-2) 60(7.68,-1.5) 61(7.68,-1) 62(7.68,-0.5) 63(7.68,0) 64(7.68,0.5) 65(7.68,1) 66(7.68,1.5) 67(7.68,2) 68(7.68,2.5) 69(7.68,3) 70(7.68,3.5) 71(7.68,4) 72(7.68,4.5) 73(7.68,5) 74(7.68,5.5) 75(7.68,6)
  rrect25% 0.28x1.56 smd: 26(-6,-7.68) 27(-5.5,-7.68) 28(-5,-7.68) 29(-4.5,-7.68) 30(-4,-7.68) 31(-3.5,-7.68) 32(-3,-7.68) 33(-2.5,-7.68) 34(-2,-7.68) 35(-1.5,-7.68) 36(-1,-7.68) 37(-0.5,-7.68) 38(0,-7.68) 39(0.5,-7.68) 40(1,-7.68) 41(1.5,-7.68) 42(2,-7.68) 43(2.5,-7.68) 44(3,-7.68) 45(3.5,-7.68) 46(4,-7.68) 47(4.5,-7.68) 48(5,-7.68) 49(5.5,-7.68) 50(6,-7.68) 76(6,7.68) 77(5.5,7.68) 78(5,7.68) 79(4.5,7.68) 80(4,7.68) 81(3.5,7.68) 82(3,7.68) 83(2.5,7.68) 84(2,7.68) 85(1.5,7.68) 86(1,7.68) 87(0.5,7.68) 88(0,7.68) 89(-0.5,7.68) 90(-1,7.68) 91(-1.5,7.68) 92(-2,7.68) 93(-2.5,7.68) 94(-3,7.68) 95(-3.5,7.68) 96(-4,7.68) 97(-4.5,7.68) 98(-5,7.68) 99(-5.5,7.68) 100(-6,7.68)
  silkscreen extent -9.02,-7.1 7.1,7.1, body extent -8,-8 8,8, height 1.6
RES2512 [mm] "Chip Resistor, 2-Leads, Body 6/40x3/20mm, IPC Medium Density DESIGNER:ABBAS BASEREH"
  rect 1.05x3.25 smd: 1(-3.05,0) 2(3.05,0)
  silkscreen extent -3.75,-1.8 3.75,1.8, body extent -3.22,-1.63 3.22,1.63, height 0.7
RESC3413X04N [mm] "Chip Resistor, 2-Leads, Body 3/40x1/30mm, IPC Medium Density-Design:Abbas Basereh"
  rect 1.55x1.45 smd: 1(-1.35,0) 2(1.35,0)
  silkscreen extent -2.29,-0.89 2.29,0.89, body extent -1.25,-0.62 1.25,0.62, height 0.79
"SMT Gullwing Lead-Form" [mm] "SOP, 4-Leads, Body 4/65x6/75mm, Pitch 2/54mm, IPC Medium Density designer:abbas basereh"
  rrect50% 2.2x1.6 smd mask+0.06: 1(-4.6,1.27) 2(-4.6,-1.27) 3(4.6,-1.27) 4(4.6,1.27)
  silkscreen extent -4.72,-2.5 3.1,2.75, body extent -5,-2.29 5,2.29, height 3.89
SO-8_N [mm] "SOIC, 8-Leads, Body 4.9x3.9mm, Pitch 1.27mm, IPC Medium Density"
  oval 2.2x0.6 smd: 1(-2.4,1.905) 2(-2.4,0.635) 3(-2.4,-0.635) 4(-2.4,-1.905) 5(2.4,-1.905) 6(2.4,-0.635) 7(2.4,0.635) 8(2.4,1.905)
  silkscreen extent -2.52,-2.5 0.9,2.88, body extent -3.17,-2.51 3.17,2.49, height 1.88
SOIC-16 [mm] "SOIC, 16-Leads, Body 9.9x3.9mm, Pitch 1.27mm, IPC Medium Density"
  oval 2.2x0.6 smd: 1(-2.4,4.445) 2(-2.4,3.175) 3(-2.4,1.905) 4(-2.4,0.635) 5(-2.4,-0.635) 6(-2.4,-1.905) 7(-2.4,-3.175) 8(-2.4,-4.445) 9(2.4,-4.445) 10(2.4,-3.175) 11(2.4,-1.905) 12(2.4,-0.635) 13(2.4,0.635) 14(2.4,1.905) 15(2.4,3.175) 16(2.4,4.445)
  silkscreen extent -2.52,-5 0.9,5.42, body extent -2.98,-5 3.02,5, height 1.75
SOT23_M [mm] "SOT23, 3-Leads, Body 2.9x1.3mm, Pitch 0.95mm, Lead Span 2.3mm, IPC Low Density"
  rect 1.6x0.6 smd: 1(-1.1,0.95) 2(-1.1,-0.95) 3(1.1,0)
  silkscreen extent -1.22,-1.5 0.7,1.92, body extent -1.27,-1.5 1.27,1.5, height 1.1
SOT223_N [mm] "SOT223, 4-Leads, Body 6.5x3.5mm, Pitch 2.3mm, Lead Span 7mm, IPC Medium Density"
  rect 2.4x1 smd: 1(-2.9,2.3) 2(-2.9,0) 3(-2.9,-2.3)
  rect 2.4x3.3 smd: 4(2.9,0)
  silkscreen extent -3.02,-3.35 1.4,3.48, body extent -3.49,-3.24 3.49,3.24, height 1.64
SSOP20_M [mm] "SOP, 20-Leads, Body 7.2x5.3mm, Pitch 0.65mm, IPC Low Density"
  oval 2.4x0.45 smd: 1(-3.5,2.925) 2(-3.5,2.275) 3(-3.5,1.625) 4(-3.5,0.975) 5(-3.5,0.325) 6(-3.5,-0.325) 7(-3.5,-0.975) 8(-3.5,-1.625) 9(-3.5,-2.275) 10(-3.5,-2.925) 11(3.5,-2.925) 12(3.5,-2.275) 13(3.5,-1.625) 14(3.5,-0.975) 15(3.5,-0.325) 16(3.5,0.325) 17(3.5,0.975) 18(3.5,1.625) 19(3.5,2.275) 20(3.5,2.925)
  silkscreen extent -3.62,-3.75 1.9,3.82, body extent -2.7,-3.75 2.7,3.75, height 1.99
TO170P1524X483-6N [mm]
  rect 3.79x0.99 smd: 1(-6.4,3.4) 2(-6.4,1.7) 3(-6.4,0) 4(-6.4,-1.7) 5(-6.4,-3.4)
  rect 7.88x10.84 smd paste-6: 6(4.35,0)
  silkscreen extent -9.1,-5.08 0.09,5.08, body extent -7.56,-5.08 6.79,5.08, height 4.65
WARNING [mm]
  silkscreen extent 0,0 12.17,11.63
"WARNING ESD" [mm]
  silkscreen extent 0,0 13.56,11.68

## Part data
1 2 C8 C9 C15 C16 C22 C25 C41 C49 C50 C51 C52 C53 C54 C55 C56: library part "Cap ELECTROLITIC TOTAL SIZE", "Cap electrolitic radial", Data=16-12-2016, Designer="Abbas Basereh"
C1 C2 C3 C5 C7 C10 C12 C13 C14 C17 C18 C19 C20 C21 C23 C24 C26 C27 C28 C29 C30 C31 C32 C33 C36 C37 C38 C39 C40 C42 C45 C46 C47 C48: library part "CAP SMD 0805", "CAP 0805", Data=16-12-2016, Desc.="CAP SMD 0805", Designer="Abbas Basereh"
C4 C6 C43 C44: library part "CAP SMD 1206", "CAP 1206", Data=16-12-2016, Desc.="CAP SMD 1206", Designer="Abbas Basereh"
D1: library part "LED SMD 1206", "SMD 1206 LED"
D2: library part "1N5822 SMD", "Schottky Rectifiers", Manufacturer="ON Semiconductor/Fairchild", Data=16-12-2016, Designer="Abbas Basereh", Link=https://www.aliexpress.com/item/Free-shipping-100pcs-1n5822-sma-smd-do-214ac-Schottky-diode-ss34/32337482329.html?spm=2114.01010208.3.1.zLZDsP&ws_ab_test=searchweb0_0,searchweb201602_4_10065_10068_10084_10083_10080_10082_10081_10060_10061_10062_10056_10055_10054_10059_10099_10078_10079_427_10073_10103_10102_10096_10052_10050_10051,searchweb201603_4&btsid=6e50dc92-ac69-45bc-a19e-209af19ce602, Part. No=SS34
D4 D5 D6 D7 D8 D9 D10 D15 D16 D17 D18 D19 D20 D21 D24 D25: library part "LED SMD 1206"
D11 D12 D13 D14 D22 D23: library part "1n4007 SMD M7", "Standard Rectifiers", Manufacturer="DC COMPONENTS", Data=16-12-2016, Designer="Abbas Basereh", Link=http://www.tme.eu/en/details/m7/smd-universal-diodes/dc-components/, Part. No=M7
Fr1 Fr2 Fr3 Fr4 Fr5 Fr6 R1 R2 R3 R4 R5 R6 R7 R8 R9 R10 R11 R12 R13 R14 R18 R19 R20 R21 R22 R23 R24 R25 R26 R27 R28 R29 R30 R31 R32 R34 R35 R36 R37 R38 R40 R41 R42 R43 R44 R80 R83 R84 R86 R87 R88 R89 R90 R91 R92 R94 R95 R96 R97 R98 R100 R101 R102 R103 R104 R105 R106 R107 R108 R109 R110 R111 R112 R113 R114 R115 R116 R117 R118 R119: library part "RES 0805 0.125W", "RES 0805", Data=16-12-2016, Desc.="RES SMD 0805", Designer="Abbas Basereh"
JP1: library part "Jumper Selector", "Jumper Selector"
K1 K2 K3 K4 K5 K6: "Electromechanical Relay 24VDC 2.8KOhm 8A SPST-NO_18.2x10.2x14.7_mm THT Industrial Relay", Package=None, Availability=Unavailable, MF="TE Connectivity", MP=1461403-5, Price=None, SnapEDA_Link=https://www.snapeda.com/parts/1461403-5/TE%20Connectivity%20Potter%20%26%20Brumfield%20Relays/view-part/2370888/?ref=snap, TE_purchase_URL=https://www.te.com/usa-en/product-1461403-5.html?te_bu=Cor&te_type=disp&te_campaign=seda_glo_cor-seda-global-disp-prtnr-fy19-seda-model-bom-cta_sma-317_1&elqCampaignId=32493
KEY1 KEY2 KEY3 SW1: library part Button_tact, "Tact button switch"
L1: library part L_CDRH127, "Inductor"
LOGO1 LOGO2: library part Graphical_WARNINGS, "WARNING & LOGO", Category=MISC, Company="SJ Libraries", ComponentLink1Description=Datasheet, Designer="Eng. Saeid Jorablo", HelpURL=http://s3.picofile.com/file/7443264187/Coming_Soon_logo.gif, Mounting Technology="Surface Mount\Through-Hole", Pin Count=0, Update Date=6/3/2012
P1 P10: library part Multi-Turn, "Potentiometer"
P2: "Male Header 1X04"
P3: "Header, 2-Pin", LatestRevisionDate=17-Jul-2002, LatestRevisionNote="Re-released for DXP Platform.", Publisher="Altium Limited"
P4 P7: "Header, 4-Pin", LatestRevisionDate=17-Jul-2002, LatestRevisionNote="Re-released for DXP Platform.", Publisher="Altium Limited"
P5: "Header, 3-Pin", LatestRevisionDate=17-Jul-2002, LatestRevisionNote="Re-released for DXP Platform.", Publisher="Altium Limited"
P6: "Receptacle Assembly, 9 Position, Right Angle", PackageDocument=O, DatasheetDocument=1-Sep-1999, Gender=Receptacle, LatestRevisionDate=17-Jul-2002, LatestRevisionNote="Re-released for DXP Platform.", Orientation="Right Angle", PackageReference=788750, Positions=9, Published=15-Jun-2001, Publisher="Altium Limited"
Q1 Q2 Q5 Q6 Q7 Q8 Q9 Q10 Q11 Q16: "DIP 4pin General Purpose  Photocoupler", ComponentLink1Description="Manufacturer Link", ComponentLink1URL=http://www.roboeq.ir/files/id/233/name/PC817.pdf/, ComponentLink2Description="DIP 4pin General Purpose", DatasheetVersion=2017-2-27, PackageDescription="SOP, 4-Leads, Body 4/65x6/75mm, Pitch 2/54mm, IPC Medium Density designer:abbas basereh", PackageReference="SMT Gullwing Lead-Form", PackageVersion=2017-2-27, Published=2017-2-27, Publisher="Abbas Basereh"
Q12 Q13 Q14 Q15 Q17 Q18 Q20 Q30: "45 V, 500 mA NPN general-purpose transistors", ComponentLink1Description="Manufacturer Link", ComponentLink1URL=http://www.nxp.com/, ComponentLink2Description=Datasheet, ComponentLink2URL=http://www.nxp.com/, DatasheetVersion=2017, LatestRevisionDate=2017, LatestRevisionNote="IPC-7351 Footprint Added.", PackageDescription="3-Pin SOT-23 Package 0.95 mm Pitch, 2.3 mm Lead Span", PackageReference=SOT23, PackageVersion=2017-2-8, Published=2017-2-8, Publisher="Abbas Basereh"
Q19: library part NPN
R15 R16 R17 R45 R46 R47 R48 R49 R50 R51 R52 R53 R54 R55 R56 R57 R58 R59 R60 R61 R62 R63 R64 R65 R66 R67 R68 R69 R70 R71 R72 R73 R74 R75 R76 R77 R78 R79 R81 R82: library part RES
T1 T2 T3 T4 T5 T6 T7 T8 T12 T13 T18 T20 T23 T24: library part CON_Phoenix_MSTB_02, "2 Pitch: 5.08 mm Color: green Contact surface: Tin Assembly", Manufacturer="PHOENIX CONTACT", Max Current="12 A", Voltage="320 V", Category=Connector, ComponentLink1Description="Header, Nominal current: 12 A Rated voltage (III/2): 320 V Number of positions: 2 Pitch: 5.08 mm Color: green Contact surface: Tin Assembly: Soldering  DESIGNER:ABBAS BASEREH", ComponentLink2Description=Reference, Connector type="PCB Terminal Block", Designer="ABBAS BASEREH", Mounting Technology=Through-Hole, PART.NO=PHOENIX, Pin Count=2, Positions=2, Revision 1=2017-3-1, Status=Unreleased
T9 T10 T14 T16 T19: library part CON_Phoenix_MSTB_03, "3 Pitch: 5.08 mm Color: green Contact surface: Tin Assembly", Manufacturer="PHOENIX CONTACT", Max Current="12 A", Voltage="320 V", Category=Connector, ComponentLink1Description="Header, Nominal current: 12 A Rated voltage (III/2): 320 V Number of positions: 3 Pitch: 5.08 mm Color: green Contact surface: Tin Assembly: Soldering  DESIGNER:ABBAS BASEREH", ComponentLink2Description=Reference, Connector type="PCB Terminal Block", Designer="ABBAS BASEREH", Mounting Technology=Through-Hole, PART.NO=PHOENIX, Pin Count=3, Positions=3, Revision 1=2017-3-1, Status=Unreleased
U1 U2 U3 U4 U5 U9: "Dual Low-Power Operational Amplifier", Code_IPC=SOIC127P600-8, Code_JEDEC=MS-012-AA, ComponentLink1Description="Manufacturer Link", ComponentLink1URL=http://www.onsemi.com/site/products/parametrics/0,4446,251,00.html, ComponentLink2Description=Datasheet, ComponentLink2URL=http://www.onsemi.com/pub/Collateral/LM358-D.PDF, DatasheetVersion=1988, LatestRevisionDate=13-Apr-2006, LatestRevisionNote="IPC-7351 Footprint Added.", PackageDescription="8-Pin Small Outline Integrated Circuit 1.27 mm Pitch", PackageReference=751-02, Published=17-Jul-2002, Publisher="Altium Limited"
U6: "No Description Available", Mfr_Name="Analog Devices Inc", Copyright="Copyright (C) 2022 Ultra Librarian. All rights reserved.", Manufacturer_Part_Number=ADE7880ACPZ, RefDes=RefDes, Type=DEV
U8: library part MC74HC244AN, "Octal 3-State Non-Inverting Buffer/Line Driver/Line Receiver", Code_JEDEC=MS-001-AD, ComponentLink1Description="Manufacturer Link", ComponentLink1URL=http://www.onsemi.com/, ComponentLink2Description=Datasheet, ComponentLink2URL=http://www.onsemi.com/pub/Collateral/MC74HC244A-D.PDF, DatasheetVersion=Mar-2000, PackageDescription="DIP; 20 Leads; Row Spacing 7.62 mm; Pitch 2.54 mm", PackageReference=738-03, PackageVersion=1996, Published=15-Apr-2002, Publisher="Altium Limited"
U10: "NodeMcu Lua ESP8266 WIFI Internet of Things Network Development Module Board", Package=None, Availability=Unavailable, MF=YKS, MP=ZC563900, Price=None, SnapEDA_Link=https://www.snapeda.com/parts/ZC563900/YKS/view-part/607853/?ref=snap
U12: "ARMÂ® CortexÂ®-M3 STM32F1 Microcontroller IC 32-Bit 72MHz 256KB _256K x 8_ FLASH", Package="LQFP-100 STMicroelectronics", Availability=Unavailable, MF=STMicroelectronics, MP=STM32F107VCT6, Price=None, SnapEDA_Link=https://www.snapeda.com/parts/STM32F107VCT6/STMicroelectronics/view-part/46316/?ref=snap
U13: "+5V Powered RS-232 Driver/Receiver", Code_JEDEC=MS-001-BB, ComponentLink1Description="Manufacturer Link", ComponentLink1URL=http://www.maxim-ic.com/, ComponentLink2Description=Datasheet, ComponentLink2URL=http://pdfserv.maxim-ic.com/en/ds/MAX220-MAX249.pdf, DatasheetVersion=Apr-1992, LatestRevisionDate=06-Jun-2005, LatestRevisionNote="Stylized 3D Model Added.", PackageDescription="DIP; 16 Leads; Row Spacing 7.62 mm; Pitch 2.54 mm", PackageReference=PE16A, PackageVersion=1997, Published=16-Jan-2001, Publisher="Altium Limited"
UP1: library part AMS1117-x.x, "x.x Volt, 800mA Low-Dropout Linear Regulator, 4-pin SOT-223", Data=16-12-2016, Designer="Ali Hafizi"
X1 X2 X3 X4 X5 X6: Manufacturer="PHOENIX CONTACT", Max Current="13.5 A", Voltage="400 V", Category=Connector, Company="SJ Libraries", ComponentLink1Description=Datasheet, ComponentLink2Description=Reference, Connector type="PCB Terminal Block", Designer="Eng. Saeid Jorablo", HelpURL=http://s3.picofile.com/file/7443264187/Coming_Soon_logo.gif, Mounting Technology=Through-Hole, Pin Count=2, Positions=2, Publisher="SJ UnLimited", Revision 1="2012/10/1 : Adding Model", Status=Unreleased, Update=2012/10/1
Y1 Y3: library part XTAL, "XTAL Crystal", ComponentLink1Description=Datasheet, ComponentLink2Description=Reference, Design Date=2017-1-3, Designer="ABBAS BASEREH", Mounting Technology="Surface Mount\Through-Hole", Status=Unreleased

## Free pads (board coordinates)
  round 6 hole 3.5: 0(-125.031,109.87) 0(-103.822,12.715) 0(-91.63,62.118) 0(-21.653,-1.001) 0(22.416,98.821)
  round 0 hole 3.1: 6(-164.02,10.429)
  round 1.524 hole 3.1: 6(-163.258,100.472)
  round 4 hole 2: 7(46.546,-28.56) 7(46.546,-18.654) 7(46.546,32.019) 7(46.8,44.084)
  round 1.524 hole 0.8: 8(-73.977,20.938) 8(-25.304,27.955) 9(-73.977,25.828) 9(-30.194,27.955)
  round 4 hole 1.6: 10(16.449,0) 10(16.449,10.287) 10(16.449,61.817) 10(16.449,72.104) 10(35.88,-4.953) 10(35.88,15.367) 10(35.88,56.864) 10(35.88,77.184)

## Via types
v1: diameter 0.762, hole 0.381, Top Layer to Bottom Layer, tented both sides, 733 vias
v2: diameter 1, hole 0.5, Top Layer to Bottom Layer, tented both sides, 230 vias
v3: diameter 1, hole 0.5, Top Layer to Bottom Layer, 35 vias
v4: diameter 1.2, hole 0.6, Top Layer to Bottom Layer, tented both sides, 28 vias
v5: diameter 0.8, hole 0.4, Top Layer to Bottom Layer, tented both sides, 10 vias
v6: diameter 1.27, hole 0.711, Top Layer to Bottom Layer, tented both sides, 4 vias
v7: diameter 0.6, hole 0.3, Top Layer to Bottom Layer, tented both sides, 3 vias
v8: diameter 1.27, hole 0.711, Top Layer to Bottom Layer, 1 vias
v9: diameter 0.9, hole 0.45, Top Layer to Bottom Layer, tented both sides, 1 vias